# Altium PCB IMX291.PcbDoc
Units mil, origin at the board's own origin, x right, y up, seen from the top; angles counter-clockwise.
Board outline 2450 x 2235 mil, 2 copper layers (Top Layer, Bottom Layer); 66 components, 59 nets, 397 pads, 71 vias.
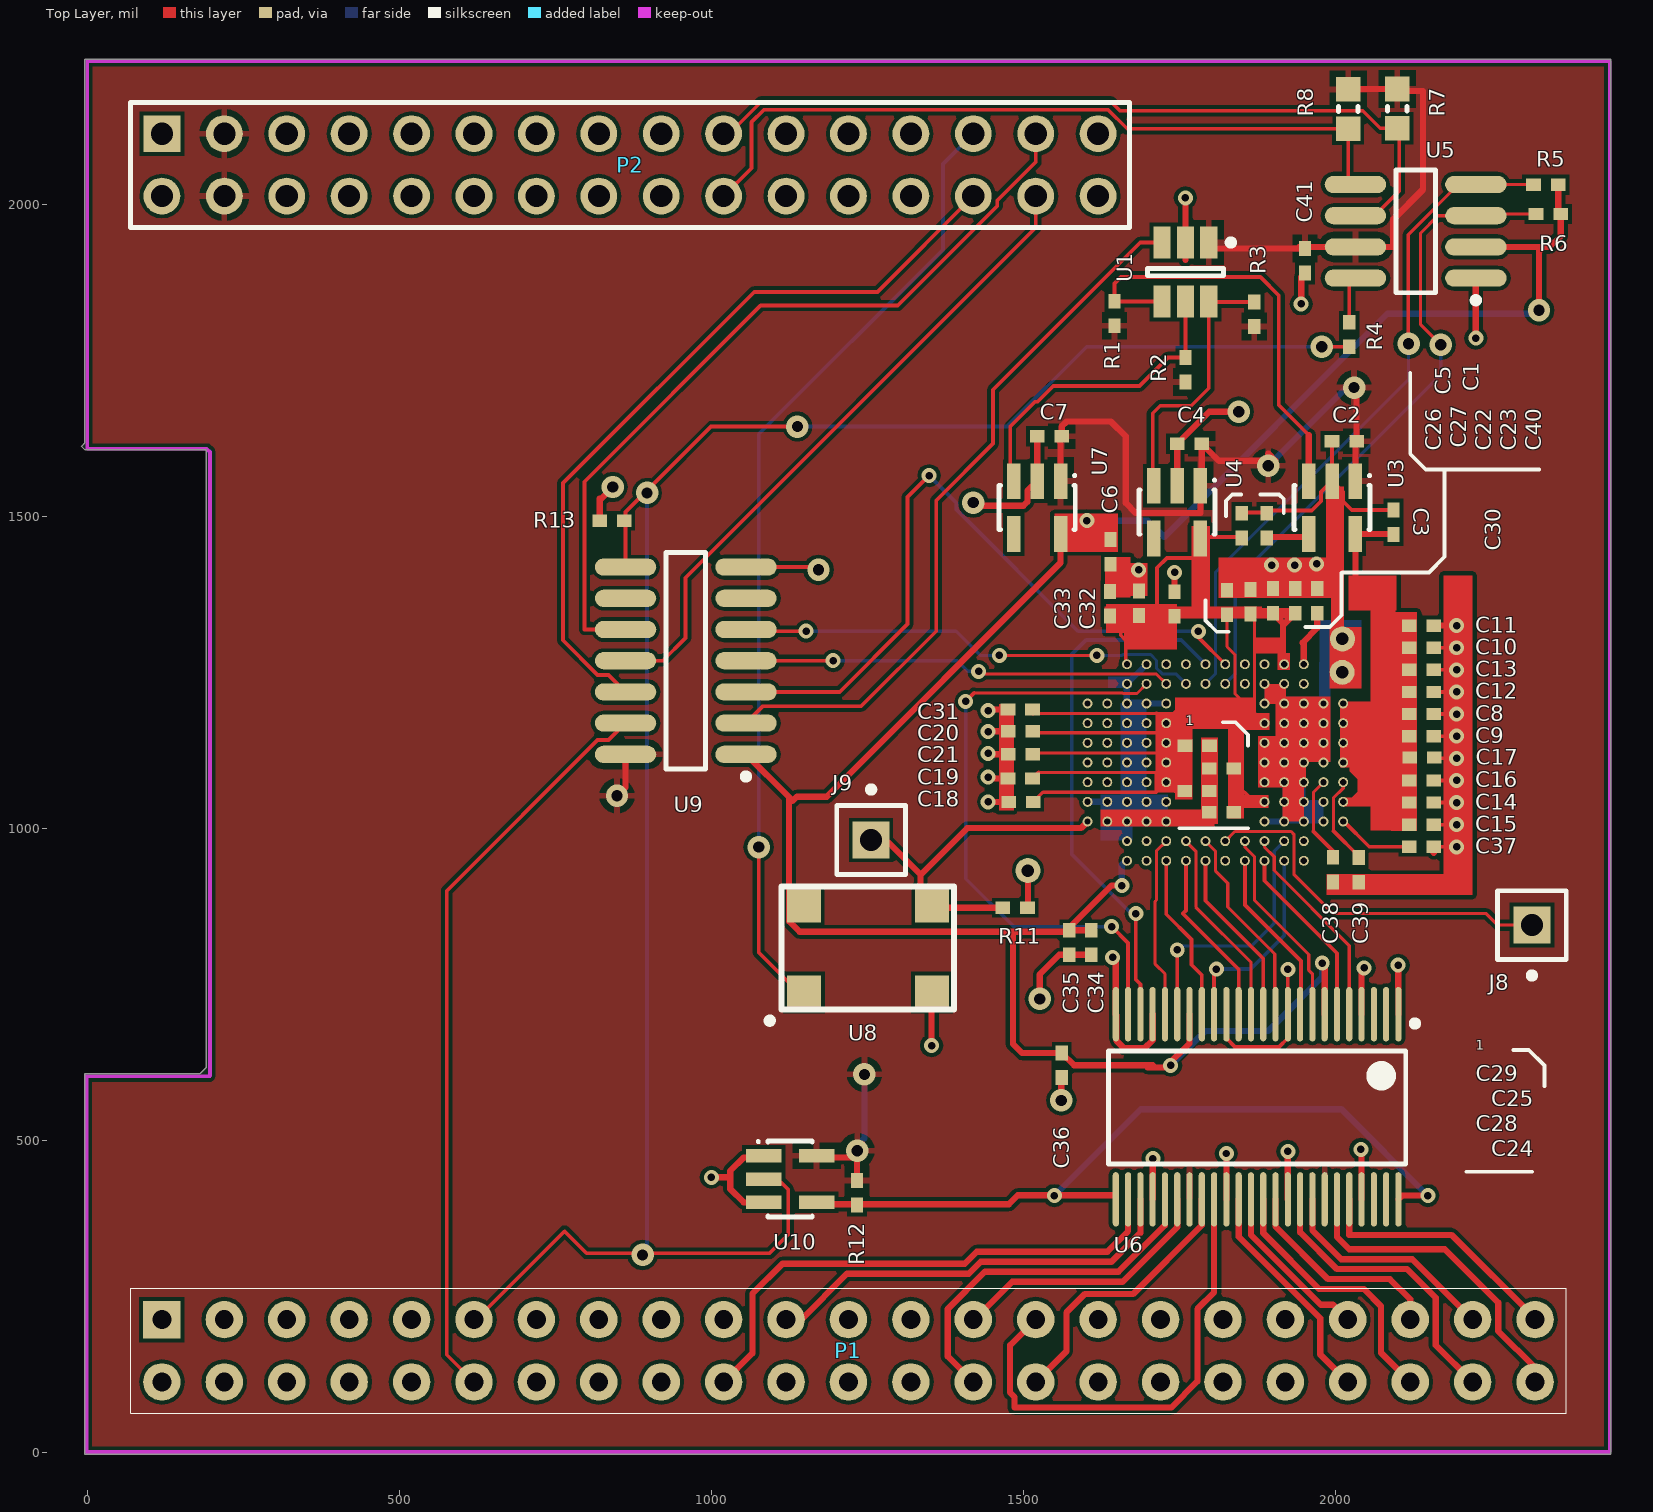
[diagram p0: Top Layer view]
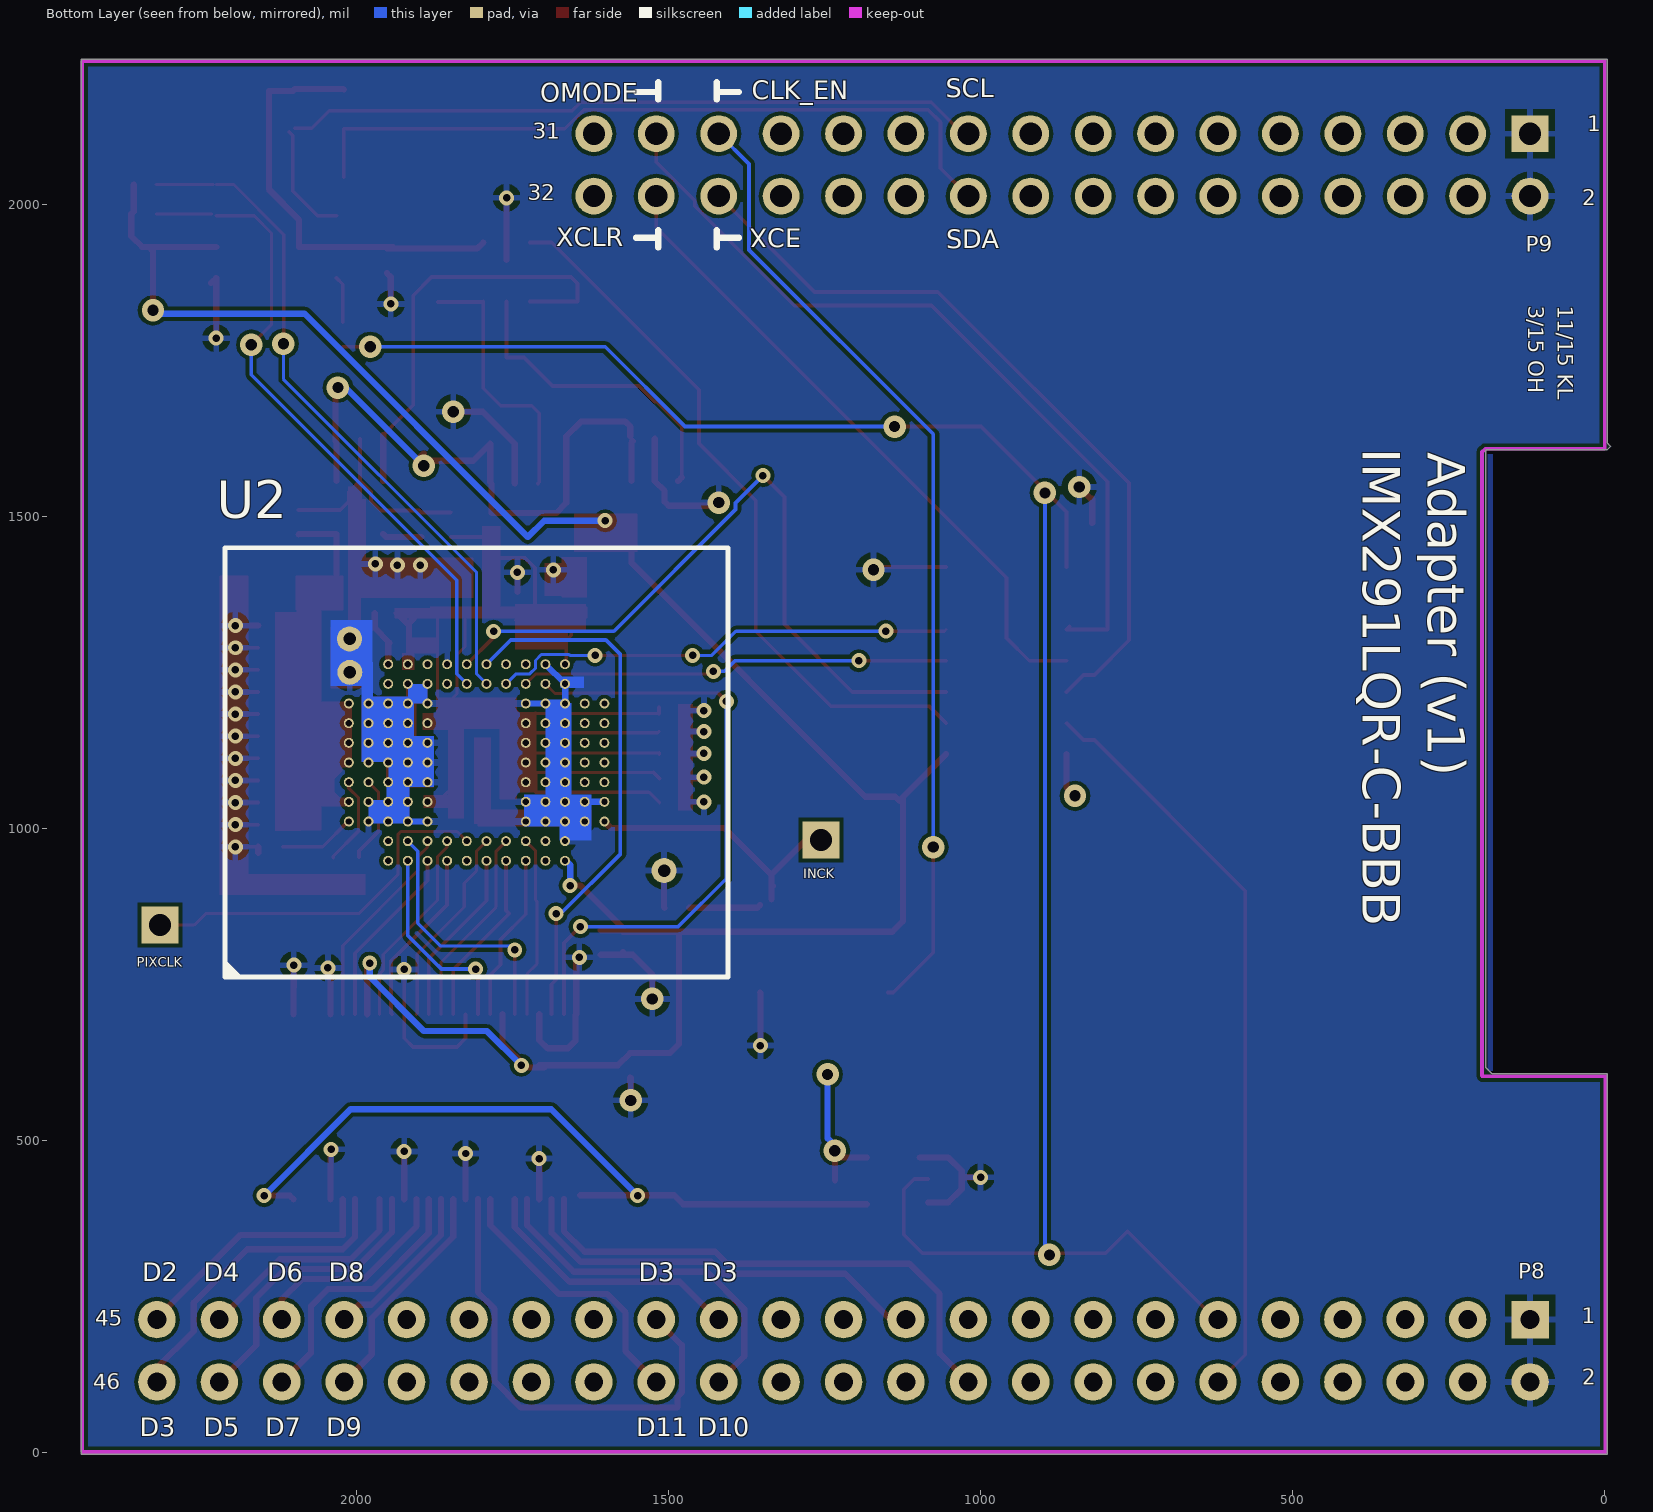
[diagram p1: Bottom Layer view, seen from below]

## Layer stack, top to bottom
Top Solder: solder mask 0.4, Solder Resist, Dk 3.5
Top Layer: signal copper 1.4
Dielectric 1: dielectric 12.6, FR-4, Dk 4.8
Bottom Layer: signal copper 1.4
Bottom Solder: solder mask 0.4, Solder Resist, Dk 3.5

## Board outline
2441.04,2231.97 2441.04,-3.03 -3.96,-3.03 -3.96,606.97 181.04,606.97 191.04,616.97 191.04,1606.97 -3.96,1606.97 -8.96,1611.97 -3.96,1616.97 -3.96,2231.97

## Design rules (kind name [scope] priority, off if disabled: settings)
Clearance [All] p1: gap=6
ComponentClearance [All] p1: gap=2 collisioncheckmode=3 verticalgap=10 showdistances=TRUE
HoleSize [All] p1: absolutevalues=TRUE maxlimit=100 minlimit=12 maxpercent=80.000 minpercent=20.000
MinimumAnnularRing [All] p1: minimumring=6
MinimumSolderMaskSliver [All] p1: minsoldermaskwidth=5
PolygonConnect [All] p1: connectstyle=Relief reliefconductorwidth=10 reliefentries=4 polygonreliefangle="90 Angle" airgapwidth=10
RoutingVias [All] p1: holewidth=28 width=50 viastyle="Through Hole" minholewidth=28 minwidth=50 maxholewidth=28 maxwidth=50
SolderMaskExpansion [All] p1: expansion=4
Width [All] p1: maxlimit=10 minlimit=5 preferedwidth=10
27 further rules are at their usual default settings.

## Components (designator, comment, footprint, x,y, rotation, side; value= is the part's Value field where it differs from the comment)
C1 "10nF" 0402#1 1890,1485 r90 top
C2 "1uF" 0402#1 2014.48,1620.31 r180 top
C3 "1uF" 0402#1 2093.22,1490.39 r270 top
C4 "1uF" 0402#1 1766.45,1616.38 r180 top
C5 "1uF" 0402#1 1850,1485 r270 top
C6 "1uF" 0402#1 1639.76,1442.91 r90 top
C7 "1uF" 0402#1 1542.04,1628.19 r180 top
C8 "0.1uF" 0402#1 2138.19,1183.07 r0 top
C9 "1.0uF" 0402#1 2138.19,1147.64 r0 top
C10 "0.1uF" 0402#1 2138.19,1289.37 r180 top
C11 "4.7uF" 0402#1 2138.19,1324.8 r180 top
C12 "0.1uF" 0402#1 2138.19,1218.5 r180 top
C13 "4.7uF" 0402#1 2138.19,1253.94 r180 top
C14 "4.7uF" 0402#1 2138.19,1041.34 r180 top
C15 "0.1uF" 0402#1 2138.19,1005.91 r180 top
C16 "4.7uF" 0402#1 2138.19,1076.77 r180 top
C17 "0.1uF" 0402#1 2139.01,1113.43 r180 top
C18 "0.01uF" 0402#1 1496.46,1042.13 r0 top
C19 "1.0uF" 0402#1 1495.28,1079.92 r0 top
C20 "0.01uF" 0402#1 1495.67,1155.51 r0 top
C21 "1.0uF" 0402#1 1495.67,1118.9 r0 top
C22 "0.1uF" 0402#1 1900.3,1364.41 r270 top
C23 "4.7uF" 0402#1 1935.74,1364.41 r270 top
C24 "0.1uF" 0402#1 1817.72,1025.98 r0 top
C25 "4.7uF" 0402#1 1817.72,1096.06 r0 top
C26 "0.1uF" 0402#1 1826.38,1361.81 r270 top
C27 "4.7uF" 0402#1 1864.17,1362.99 r270 top
C28 "0.1uF" 0402#1 1778.35,1059.84 r180 top
C29 "4.7uF" 0402#1 1778.74,1132.28 r180 top
C30 "0.1uF" 0402#1 1742.52,1359.45 r270 top
C31 "4.7uF" 0402#1 1495.28,1190.55 r0 top
C32 "0.1uF" 0402#1 1685.43,1360.63 r270 top
C33 "4.7uF" 0402#1 1638.98,1359.84 r270 top
C34 ".01uF" 0402#1 1608.96,817.16 r270 top
C35 "4.7uF" 0402#1 1573.53,817.16 r270 top
C36 "18pF" 0402#1 1561.72,620.31 r90 top
C37 "1uF" 0402#1 2138.19,970.47 r0 top
C38 "1uF" 0402#1 1996.46,933.86 r270 top
C39 "1uF" 0402#1 2037.4,933.46 r270 top
C40 "0.22uF" 0402#1 1971.17,1364.41 r90 top
C41 "1uF" 0402#2 1951.58,1909.33 r270 top
J8 "PIXCLK" PIN1 2314.96,844.88 r180 top
J9 "INCK" PIN1 1256.3,981.5 r0 top
P1 "P8" HEADER23X2 1220,162.97 r0 top
P2 "P9" HDR2X16 120,2112.97 r0 top
R1 "100k" 0402#1 1646.06,1824.8 r270 top
R2 "100k" 0402#2 1759.84,1734.65 r90 top
R3 "100k" 0402#1 1870.08,1823.62 r270 top
R4 "200k" 0402#1 2022.44,1791.22 r90 top
R5 "1k" 0402#1 2337.4,2031.38 r0 top
R6 "1k" 0402#1 2341.34,1984.14 r0 top
R7 "10k" 0603 2099.22,2153.04 r270 top
R8 "10k" 0603 2020.59,2152.4 r270 top
R11 "1K" 0402#1 1487.01,872.83 r180 top
R12 "1K" 0402#1 1233.67,416.22 r90 top
R13 "1K" 0402#1 841.25,1492.99 r0 top
U1 "LM3880" SOT23-6_M 1759.84,1891.34 r270 top
U2 "IMX291" SOCKET 1807.87,1105.51 r0 bottom
U3 "LP3985_2.9" DBV005 1994.79,1514.01 r180 top
U4 "LP3990_1.2" DBV005 1746.46,1506.69 r180 top
U5 "PCA9306" D008_M 2128.74,1956.58 r180 top
U6 "SN74AVCH16T245" TSSOP48 2101.09,687.24 r270 top
U7 "LP3990_1.8" DBV005 1522.35,1514.01 r180 top
U8 "DSC1001" DSC1001 1283.87,781.9 r180 top
U9 "TXB0104" TSSOP14_M 959.36,1268.58 r180 top
U10 "SN74LVC1G04" DBV005 1126.58,438.04 r270 top

## Footprints (in the part's own frame and the unit in brackets; to place one, negate y for a bottom-side part, rotate by r counter-clockwise, add the part's x,y. Pads: shape width x height; smd on the part's side, far side on the other; paste and mask are expansions set on the pad)
0402#1 [mm] "Chip Capacitor, Body 1.0x0.5mm, IPC High Density"
  rect 0.6x0.5 smd: 1(-0.5,0) 2(0.5,0)
  body extent -0.55,-0.3 0.55,0.3, height 1.3
0402#2 [mm] "Chip Capacitor, Body 1.0x0.5mm, IPC High Density"
  rect 0.6x0.5 smd: 1(0.5,0) 2(-0.5,0)
  body extent -0.55,-0.3 0.55,0.3, height 1.3
0603 [mm] "Chip Capacitor, 2-Leads, Body 1.6x0.8mm, IPC Medium Density"
  rect 1x1 smd: 1(-0.8,0) 2(0.8,0)
  silkscreen extent -0.1,-0.4 0.1,0.4, body extent -0.9,-0.5 0.9,0.5, height 0.87
D008_M [mm] "8-Pin Small Outline Integrated Circuit 1.27 mm Pitch, IPC Low Density"
  oval 2.5x0.7 smd: 1(-2.45,1.905) 2(-2.45,0.635) 3(-2.45,-0.635) 4(-2.45,-1.905) 5(2.45,-1.905) 6(2.45,-0.635) 7(2.45,0.635) 8(2.45,1.905)
  silkscreen extent -2.58,-2.5 0.8,2.93, body extent -2,-2.5 2,2.5, height 1.75
DBV005 [mm] "SOT-23/SC-74A; 5 Leads; Body 3 x 3 mm, inc. leads (LxW max)"
  rect 0.55x1.45 smd: 1(-0.95,-1.075) 2(0,-1.075) 3(0.95,-1.075) 4(0.95,1.075) 5(-0.95,1.075)
  silkscreen extent -1.58,-1.35 1.55,0.9
DSC1001 [mil]
  rect 55x55 smd paste+0 mask+0: 1(135,45) 2(-70,45) 3(-70,-95) 4(135,-95)
  Top Overlay keep-out lines w10: 171,72 171,-125 -105,-125 -105,72 171,72
  silkscreen extent -105,-125 195,95
HDR2X16 [mm] "Connector; Header; 16x2 Position"
  rect 1.5x1.5 hole 0.9: 1(0,0)
  round 1.5 hole 0.9: 2(0,-2.54) 3(2.54,0) 4(2.54,-2.54) 5(5.08,0) 6(5.08,-2.54) 7(7.62,0) 8(7.62,-2.54) 9(10.16,0) 10(10.16,-2.54) 11(12.7,0) 12(12.7,-2.54) 13(15.24,0) 14(15.24,-2.54) 15(17.78,0) 16(17.78,-2.54) 17(20.32,0) 18(20.32,-2.54) 19(22.86,0) 20(22.86,-2.54) 21(25.4,0) 22(25.4,-2.54) 23(27.94,0) 24(27.94,-2.54) 25(30.48,0) 26(30.48,-2.54) 27(33.02,0) 28(33.02,-2.54) 29(35.56,0) 30(35.56,-2.54) 31(38.1,0) 32(38.1,-2.54)
  silkscreen extent -1.27,-3.81 39.37,1.27
HEADER23X2 [mil] "HEADER23X2"
  rect 60x60 hole 30 mask+2: 1(-1100,50)
  round 60 hole 30 mask+2: 2(-1100,-50) 3(-1000,50) 4(-1000,-50) 5(-900,50) 6(-900,-50) 7(-800,50) 8(-800,-50) 9(-700,50) 10(-700,-50) 11(-600,50) 12(-600,-50) 13(-500,50) 14(-500,-50) 15(-400,50) 16(-400,-50) 17(-300,50) 18(-300,-50) 19(-200,50) 20(-200,-50) 21(-100,50) 22(-100,-50) 23(0,50) 24(0,-50) 25(100,50) 26(100,-50) 27(200,50) 28(200,-50) 29(300,50) 30(300,-50) 31(400,50) 32(400,-50) 33(500,50) 34(500,-50) 35(600,50) 36(600,-50) 37(700,50) 38(700,-50) 39(800,50) 40(800,-50) 41(900,50) 42(900,-50) 43(1000,50) 44(1000,-50) 45(1100,50) 46(1100,-50)
  silkscreen extent -1150,-100 1150,100
PIN1 [mm] "Connector; Plug"
  rect 1.5x1.5 hole 0.9: 1(0,0)
  silkscreen extent -1.4,-1.4 1.4,2.17
SOCKET [mil]
  round 16 hole 10 mask+0: 2(204.72,94.49) 3(204.72,62.99) 4(204.72,31.5) 5(204.72,0) 6(204.72,-31.5) 7(204.72,-62.99) 8(204.72,-94.49) 10(173.23,94.49) 11(173.23,62.99) 12(173.23,31.5) 13(173.23,0) 14(173.23,-31.5) 15(173.23,-62.99) 16(173.23,-94.49) 17(141.73,157.48) 18(141.73,125.98) 19(141.73,94.49) 20(141.73,62.99) 21(141.73,31.5) 22(141.73,0) 23(141.73,-31.5) 24(141.73,-62.99) 25(141.73,-94.49) 26(141.73,-125.98) 27(141.73,-157.48) 28(110.24,157.48) 29(110.24,125.98) 30(110.24,94.49) 31(110.24,62.99) 32(110.24,31.5) 33(110.24,0) 34(110.24,-31.5) 35(110.24,-62.99) 36(110.24,-94.49) 37(110.24,-125.98) 38(110.24,-157.48) 39(78.74,157.48) 40(78.74,125.98) 41(78.74,94.49) 42(78.74,62.99) 43(78.74,31.5) 44(78.74,0) 45(78.74,-31.5) 46(78.74,-62.99) 47(78.74,-94.49) 48(78.74,-125.98) 49(78.74,-157.48) 50(47.24,157.48) 51(47.24,125.98) 52(47.24,-125.98) 53(47.24,-157.48) 54(15.75,157.48) 55(15.75,125.98) 56(15.75,-125.98) 57(15.75,-157.48) 58(-15.75,157.48) 59(-15.75,125.98) 60(-15.75,-125.98) 61(-15.75,-157.48) 62(-47.24,157.48) 63(-47.24,125.98) 64(-47.24,-125.98) 65(-47.24,-157.48) 66(-78.74,157.48) 67(-78.74,125.98) 68(-78.74,94.49) 69(-78.74,62.99) 70(-78.74,31.5) 71(-78.74,0) 72(-78.74,-31.5) 73(-78.74,-62.99) 74(-78.74,-94.49) 75(-78.74,-125.98) 76(-78.74,-157.48) 77(-110.24,157.48) 78(-110.24,125.98) 79(-110.24,94.49) 80(-110.24,62.99) 81(-110.24,31.5) 82(-110.24,0) 83(-110.24,-31.5) 84(-110.24,-62.99) 85(-110.24,-94.49) 86(-110.24,-125.98) 87(-110.24,-157.48) 88(-141.73,157.48) 89(-141.73,125.98) 90(-141.73,94.49) 91(-141.73,62.99) 92(-141.73,31.5) 93(-141.73,0) 94(-141.73,-31.5) 95(-141.73,-62.99) 96(-141.73,-94.49) 97(-141.73,-125.98) 98(-141.73,-157.48) 99(-173.23,94.49) 100(-173.23,62.99) 101(-173.23,31.5) 102(-173.23,0) 103(-173.23,-31.5) 104(-173.23,-62.99) 105(-173.23,-94.49) 107(-204.72,94.49) 108(-204.72,62.99) 109(-204.72,31.5) 110(-204.72,0) 111(-204.72,-31.5) 112(-204.72,-62.99) 113(-204.72,-94.49)
  silkscreen extent -403,-344 405,344, body extent -405,-345 405,345, height 138
SOT23-6_M [mm] "SOT23, 6-Leads, Body 2.9x1.6mm, Pitch 0.95mm, Lead Span 2.7mm, IPC Low Density"
  rect 1.3x0.7 smd: 1(-1.2,0.95) 2(-1.2,0) 3(-1.2,-0.95) 4(1.2,-0.95) 5(1.2,0) 6(1.2,0.95)
  silkscreen extent -1.32,-1.55 0.15,1.98, body extent -0.9,-1.55 0.9,1.55, height 1.45
TSSOP14_M [mm] "14-Pin Small Outline Integrated Circuit 1.27 mm Pitch, IPC Low Density"
  oval 2.5x0.7 smd: 1(-2.45,3.81) 2(-2.45,2.54) 3(-2.45,1.27) 4(-2.45,0) 5(-2.45,-1.27) 6(-2.45,-2.54) 7(-2.45,-3.81) 8(2.45,-3.81) 9(2.45,-2.54) 10(2.45,-1.27) 11(2.45,0) 12(2.45,1.27) 13(2.45,2.54) 14(2.45,3.81)
  silkscreen extent -2.58,-4.4 0.8,4.83, body extent -2,-4.38 2,4.38, height 1.75
TSSOP48 [mm]
  oval 2.212x0.25 smd: 1(-0.381,0) 2(-0.381,-0.5) 3(-0.381,-1) 4(-0.381,-1.5) 5(-0.381,-2) 6(-0.381,-2.5) 7(-0.381,-3) 8(-0.381,-3.5) 9(-0.381,-4) 10(-0.381,-4.5) 11(-0.381,-5) 12(-0.381,-5.5) 13(-0.381,-6) 14(-0.381,-6.5) 15(-0.381,-7) 16(-0.381,-7.5) 17(-0.381,-8) 18(-0.381,-8.5) 19(-0.381,-9) 20(-0.381,-9.5) 21(-0.381,-10) 22(-0.381,-10.5) 23(-0.381,-11) 24(-0.381,-11.5) 25(7.154,-11.5) 26(7.154,-11) 27(7.154,-10.5) 28(7.154,-10) 29(7.154,-9.5) 30(7.154,-9) 31(7.154,-8.5) 32(7.154,-8) 33(7.154,-7.5) 34(7.154,-7) 35(7.154,-6.5) 36(7.154,-6) 37(7.154,-5.5) 38(7.154,-5) 39(7.154,-4.5) 40(7.154,-4) 41(7.154,-3.5) 42(7.154,-3) 43(7.154,-2.5) 44(7.154,-2) 45(7.154,-1.5) 46(7.154,-1) 47(7.154,-0.5) 48(7.154,0)
  silkscreen extent -0.12,-11.8 5.72,0.8, body extent 0.33,-11.8 6.48,0.3, height 1.2

## Part data
C1 C2 C3 C4 C5 C6 C7 C8 C9 C10 C11 C12 C13 C14 C15 C16 C17 C18 C19 C20 C21 C22 C23 C24 C25 C26 C27 C28 C29 C30 C31 C32 C33 C34 C35 C36 C37 C38 C39 C40 C41: library part cap
J8 J9: library part Socket, "Socket"
P1: library part HDR_46_F_2_0.1_0.1, "CONN HEADER FMAL 46PS.1\" DL GOLD"
P2: library part "Header 16X2"
R1 R2 R3 R4 R5 R6 R7 R8: library part Res, "resistor"
R11 R12 R13: library part res
U3: library part LP3985
U4 U7: library part LP3990

## Free pads (board coordinates)
  round 40 hole 20: 1(2011.02,1250) 1(2011.42,1303.54) 2(1507.48,932.28)

## Via types
v1: diameter 24, hole 12, Top Layer to Bottom Layer, 52 vias
v2: diameter 36, hole 18, Top Layer to Bottom Layer, 19 vias

## Nets (pads, with @x,y where several pads share a name; then routed paths per layer and width w, separated by ;. In a path a pad name is that pad's centre, name@x,y a point inside that pad or via, vN(x,y) a via of type N, cw(c..) or ccw(c..) an arc to the next point about the centre after c; other vN are vias at no path point)
1.2V: C5.2 C18.2 C19.2 C20.2 C21.2 C22.2 C23.2 C24.2 C25.2 C26.2 C27.2 C28.2 C29.2 C30.2 C31.2 C32.2 C33.2 U2.38 U2.42 U2.46 U2.70 U2.71 U2.72 U2.73 U2.98 U4.5 | length 2261.5
  Top Layer w5: C18.2@1514.57,1040.94 1531.53,1057.91 1609.52,1057.91 1609.66,1057.77 1628.13,1057.77 1628.27,1057.91 1641.02,1057.91 1641.16,1057.77 1659.63,1057.77 1659.77,1057.91 1672.52,1057.91 1672.66,1057.77 1691.12,1057.77 1691.26,1057.91 1704.01,1057.91 1704.15,1057.77 1713.14,1057.77 ; C21.2@1515.35,1121.01 1713.14,1121.01 ; C20.2 1517.75,1153.11 1713.03,1153.11 ; C31.2@1515.75,1184 1713.64,1184 ; C19.2@1524.68,1089.64 1713.14,1089.64 ; C26.2 1826.38,1291.24 1839.12,1278.49 1839.12,1216 1870.62,1184.5 C27.2@1870.62,1336.86
  Top Layer w6: C19.2 C19.2@1524.68,1089.64 ; C21.2 C21.2@1515.35,1121.01 ; C31.2@1515.75,1184 C31.2@1515.75,1194.09 ; C33.2@1638.98,1343.31 1656.21,1326.07 1656.21,1309.29 1664.08,1301.42 ; U2.98 1664.08,1265.05 1664.08,1301.42 ; C32.2@1684.96,1334.1 1664.08,1313.23 1664.08,1301.42 ; C32.2 1696.85,1340.94 1714.42,1358.52 1714.42,1417.57 1730.16,1433.31 1784.16,1433.31 ; 1713.03,1153.11 U2.72 1713.14,1121.01 ; 1713.14,1057.77 1713.14,1067.04 1713.53,1067.43 1713.53,1080.6 1713.14,1080.99 1713.14,1089.64 ; 1713.14,1089.52 U2.71 ; 1713.64,1184 U2.73 1729.13,1172.03 1745,1187.89 ; C30.2@1738.58,1339.76 C30.2@1745,1333.35 ; 1758.27,1102.76 1729.53,1074.02 U2.70 1743.31,1059.84 C28.2 ; 1790.07,1433.31 1784.16,1433.31 ; C24.2@1835.83,1018.9 1859.45,1042.52 1869.68,1042.52 ; C25.2 1837.4,1074.8 1869.68,1042.52 ; C5.2@1849.12,1466.77 1785.15,1466.77 1784.16,1467.75 1784.16,1433.31 ; C27.2 C27.2@1870.62,1336.86 ; 1870.62,1184.5 U2.46 ; U2.42 1869.68,1042.52
  Top Layer w10: C22.2 1916.05,1328.97 ; U2.38 1916.05,1265.05 1916.05,1325.04 C23.2
  Bottom Layer w6: U2.98@1664.08,1265.84 U2.98@1665.75,1264.17
1.8V: C6.2 C34.1 C35.1 C36.2 R5.2 R6.2 U2.88 U5.2 U6.7 U6.18 U7.5 U8.4 U9.1 | length 3802.6
  Top Layer w10: U9.1 1124.83,1049.56 ; C35.1@1573.53,840.52 1641.3,908.28 v1(1657.91,908.28) ; 1605.03,1471.69 U7.5 1559.75,1425.43 1185.05,1050.73 1137.34,1050.73 1130.5,1043.89 1124.83,1049.56 ; C34.1 C35.1 1573.53,834.16 1483.49,834.16 ; 1699.48,617.02 1727.72,617.02 1766.45,655.75 U6.18 ; 1707.39,620.31 1581.41,620.31 C36.2 1498.1,640 1483.49,654.6 1483.49,834.16 ; v1(1979.07,784.23) 1982.98,780.32 U6.7 ; U5.2 2333.07,1931.58 ; v2(2326.38,1829.92) 2326.38,1924.88 2333.07,1931.58 ; R5.2 2357.09,1988.07 R6.2 2361.03,1948.7 2343.9,1931.58 2333.07,1931.58 ; 1124.83,1049.56 1124.83,851.02 1141.69,834.16 1483.49,834.16
  Bottom Layer w10: v1(1601.97,1492.91) 1699.68,1492.91 1725.83,1466.77 2083.46,1824.41 2320.47,1824.41 v2@2324.41,1820.47 ; v1(1657.91,908.28) 1657.91,941.37 U2.88@1665.75,949.21 ; v1(1736.3,620.31) 1791.3,675.32 1892.46,675.32 1979.07,761.92 v1(1979.07,784.23)
2.9V: C3.2 C8.1 C9.1 C10.2 C11.2 C12.2 C13.2 C14.2 C15.2 C16.2 C17.2 U2.3 U2.5 U2.6 U2.7 U2.8 U3.5 | length 202.4
  Top Layer w10: 2032.19,1393.94 U3.5 2092.23,1471.69 C3.2 ; 2102.76,1167.32 C8.1 ; 2102.76,1238.19 C13.2 ; C9.1@2110.63,1139.76 C9.1 ; C12.2@2114.57,1214.57 C12.2 ; C11.2@2118.5,1322.83 C11.2
3.3V: C2.1 C4.1 C7.1 C41.2 P2.3 P2.4 R1.2 R2.2 R3.2 R7.1 R8.1 R12.2 U1.1 U3.1 U4.1 U5.7 U6.31 U6.42 U7.1 U9.14 U10.5 | length 2046.2
  Top Layer w10: v2(849.12,1052.04) 862.9,1065.82 U9.14 ; U10.5@1182.78,472.68 v2@1233.67,472.68 ; R12.2 v2@1233.67,472.68 ; v2(1233.89,483.64) 1233.67,483.42 v2@1233.67,472.68 ; v2@1233.89,486.45 1241.28,493.85 1242.45,493.85 1234.02,485.43 v2@1234.02,483.64 ; C7.1@1557.78,1620.31 1559.75,1618.34 U7.1 ; C7.1 1561.72,1643.94 1569.59,1651.81 1640.46,1651.81 1664.08,1628.19 1664.08,1521.35 1680.32,1505.12 1784.16,1505.12 1784.16,1552.4 1786.13,1554.37 C4.1@1786.13,1612.44 ; C4.1 1813.53,1588.98 1904.08,1588.98 1892.43,1600.63 v2(1892.43,1580.94) ; U1.1 1806.81,1929.02 C41.2 ; C41.2@1942.32,1931.58 U5.7 2092.36,1931.58 2092.5,1931.72 2092.5,1975.51 2140.5,2023.52 2140.5,2181.57 2102.18,2181.57 R7.1 2021.22,2184.53 R8.1 ; U3.1 2032.19,1622.28 C2.1 v2@2034.16,1699.05
  Bottom Layer w10: v2@1237.31,493.85 1236.8,494.36 1245.63,503.2 v2(1245.63,605.83) ; v2(1892.43,1580.94) v2@2022.35,1710.86
  other v2: 2030.13,1706.25
CLK_ENABLE: P2.27 U8.1 | length 1553.8
  Top Layer w6: v2(1076.09,970.03) 1076.09,801 1140.2,736.9 U8.1
  Bottom Layer w6: v2(1076.09,970.03) 1076.09,1631.6 1371.26,1926.77 1371.26,2064.23 P2.27
D0: P1.27 U6.30 | length 432.5
  Top Layer w10: P1.27 1421.63,212.97 1482.28,273.62 1659.19,273.62 1746.76,361.19 U6.30
D0B: U2.29 U6.19 | length 414.2
  Top Layer w5: U6.19 v1(1746.76,805.35)
  Bottom Layer w5: v1(1746.76,805.35) 1752.67,811.26 1865.26,811.26 1902.11,848.11 1902.11,963.53 U2.29
D1: P1.29 U6.33 | length 773.9
  Top Layer w10: P1.29 1479,171.97 1479,95.99 1486.14,88.85 1486.14,71.97 1736.99,71.97 1779,113.99 1779,229.95 1805.82,256.76 U6.33
D1B: U2.28 U6.16 | length 340.9
  Top Layer w6: U6.16 1805.82,781.73 1809.36,778.19 v1(1809.36,774.64)
  Bottom Layer w6: v1(1809.36,774.64) 1864.35,774.64 1877.56,787.85 1918.11,828.41 U2.28 U2.28@1915.87,948.03
D2: P1.45 U6.44 | length 412
  Top Layer w10: U6.44 2022.35,348.52 2186.31,348.52 2320,214.82 P1.45
D3: P1.46 U6.43 | length 513.8
  Top Layer w10: U6.43 2002.67,345.37 2022.22,325.81 2175.37,325.81 2261,240.18 2261,194.6 2320,135.6 P1.46
D4: P1.43 U6.41 | length 365.6
  Top Layer w10: U6.41 1963.3,355.88 2009.36,309.81 2123.16,309.81 P1.43
D5: P1.44 U6.40 | length 472.8
  Top Layer w10: U6.40 1943.61,352.94 2002.74,293.81 2114.96,293.81 2161,247.77 2161,171.97 P1.44
D6: P1.41 U6.38 | length 340.1
  Top Layer w10: U6.38 1904.24,361.9 1988.33,277.81 2087.54,277.81 2120,245.35 P1.41
D7: P1.42 U6.37 | length 432.1
  Top Layer w10: U6.37 1884.56,351.66 1974.4,261.81 2046.08,261.81 2073.23,234.67 2073.23,159.75 P1.42
D8: P1.39 U6.36 | length 268.2
  Top Layer w10: U6.36 1864.87,348.71 1977,236.58 1996.39,236.58 P1.39
D9: P1.40 U6.35 | length 365
  Top Layer w10: U6.35 1845.19,345.77 1975.98,214.97 1975.98,156.99 P1.40
D10: P1.28 U6.29 | length 579.1
  Top Layer w10: P1.28 1379,153.97 1379,229.95 1438.67,289.62 1652.56,289.62 1727.08,364.14 U6.29
D10G: U2.67 U6.20 | length 291.2
  Top Layer w5: U6.20 1727.08,766.77 1711.33,782.52 1711.33,882.98 1713.63,885.29 1713.63,964.03 U2.67
D11: P1.30 U6.32 | length 448
  Top Layer w10: P1.30 1569.29,162.26 1569.29,224.41 1598.85,253.97 1675.97,253.97 1786.13,364.14 U6.32
FLAG1: R3.1 U1.6 U4.3 | length 432
  Top Layer w6: U4.3@1709.36,1552.4 1707.39,1554.37 1707.39,1664.96 1719.59,1677.17 1769.29,1677.17 1797.24,1705.12 U1.6 1798.03,1843.31 R3.1
FLAG2: R2.1 U1.5 U7.3 | length 506.3
  Top Layer w6: U7.3@1479.04,1562.24 1479.04,1643.94 1518.41,1683.31 1522.35,1683.31 1547.94,1708.9 1686.45,1708.9 1731.89,1754.33 R2.1 U1.5
  Top Layer w10: U7.3@1479.04,1562.24 U7.3
FLAG3: R1.1 U1.4 U3.3 | length 702.4
  Top Layer w6: U1.4 1646.46,1844.09 R1.1 1646.06,1872.83 1656.69,1883.46 1879.92,1883.46 1909.46,1853.93 1909.46,1678.09 1957.39,1630.16
  Top Layer w10: U3.3 1957.39,1630.16
FRAME_VALID: U2.61 U6.22 | length 866.7
  Top Layer w6: v1(1680.32,863.39) 1680.32,757.62 1687.71,750.23 U6.22
  Bottom Layer w6: v1(1680.32,863.39) 1673.11,863.39 1577.56,958.93 1577.56,1278.74 1600.79,1301.97 1753.15,1301.97 U2.61
FRAME_VALID3.3: P1.21 U6.27 | length 679
  Top Layer w10: P1.21 1144.07,212.97 1217.57,286.47 1412.9,286.47 1432.05,305.62 1641.46,305.62 1687.71,351.87 U6.27
GND: C1.2 C2.2 C3.1 C4.2 C5.1 C6.1 C7.2 C8.2 C9.2 C10.1 C11.1 C12.1 C13.1 C14.1 C15.1 C16.1 C17.1 C18.1 C19.1 C20.1 C21.1 C22.1 C23.1 C24.1 C25.1 C26.1 C27.1 C28.1 C29.1 C30.1 C31.1 C32.1 C33.1 C34.2 C35.2 C36.1 C37.2 C38.2 C39.2 C40.2 C41.1 P1.1 P1.2 P2.1 P2.2 pad.1 pad.2 R11.1 R13.1 U1.2 U2.10 U2.11 U2.13 U2.14 U2.15 U2.16 U2.19 U2.20 U2.21 U2.22 U2.23 U2.24 U2.25 U2.30 U2.31 U2.32 U2.33 U2.34 U2.35 U2.36 U2.37 U2.41 U2.43 U2.44 U2.45 U2.47 U2.48 U2.53 U2.68 U2.69 U2.74 U2.79 U2.80 U2.81 U2.82 U2.83 U2.84 U2.85 U2.87 U2.89 U2.90 U2.91 U2.92 U2.93 U2.94 U2.95 U2.96 U2.97 U2.99 U2.100 U2.108 U3.2 U4.2 U5.1 U6.1 U6.4 U6.10 U6.15 U6.21 U6.24 U6.28 U6.34 U6.39 U6.45 U7.2 U8.2 U9.7 U10.1 U10.3 | length 4083.5
  Top Layer w6: U9.7@1055.42,1418.19 U9.7 1167.63,1418.58 v2(1171.96,1414.25) ; C33.1@1638.98,1382.68 1683.07,1382.68 C32.1 ; C25.1@1796.46,1101.57 C25.1@1798.43,1103.54 ; U6.15 1825.5,663.62 1839.42,649.7 1910.01,649.7 1923.93,663.62 U6.10 1923.93,773.91 v1(1924.03,774.02) ; C5.1@1849.12,1506.14 1896.37,1506.14 1899.46,1509.23 1962.39,1509.23 1977.22,1524.07 1977.22,1538.76 U3.2 ; C22.1 1994.79,1384.09 U3.2 ; C2.2@1994.79,1624.25 U3.2 ; C3.1 2026.36,1510.08 2012.37,1524.07 2012.37,1538.76 U3.2 ; C37.2 v1(2194.43,970.47) ; C15.1 v1(2194.43,1005.91) ; C14.1 v1(2194.43,1041.34) ; C16.1 v1(2194.43,1076.77) ; C17.1@2157.87,1112.2 v1(2194.43,1112.2) ; C9.2 v1(2194.43,1147.64) ; C8.2 v1(2194.43,1183.07) ; C12.1 v1(2194.43,1218.5) ; C13.1 v1(2194.43,1253.94) ; C10.1 v1(2194.43,1289.37)
  Top Layer w10: R13.1@821.56,1489.05 821.56,1528.42 823.96,1528.42 v2(842.44,1546.9) ; v1(1000.39,440.94) 1029.32,440.94 1030.5,442.13 ; U10.3 1052.01,400.64 1030.5,422.14 1030.5,442.13 ; U10.1@1098.14,472.68 1052.07,472.68 1030.5,451.11 1030.5,442.13 ; v2(1171.96,1414.25) v2@1179.83,1414.25 ; v1(1353.15,651.97) 1353.15,736.17 U8.2 ; v2(1419.99,1521.89) 1425.08,1516.79 1500.33,1516.79 1506.78,1523.24 1506.78,1540.76 U7.2 C7.2@1522.35,1624.25 ; v1(1443.7,1042.52) 1444.09,1042.13 C18.1 ; v1(1443.7,1081.89) 1445.67,1079.92 C19.1 ; v1(1443.7,1120.08) 1444.88,1118.9 C21.1 ; v1(1443.7,1155.12) 1444.09,1155.51 C20.1 ; v1(1443.7,1188.58) 1445.67,1190.55 C31.1 ; R11.1 1507.48,873.62 pad.2 ; v2(1526.29,726.61) 1526.29,765.98 1557.78,797.48 C35.2@1569.59,797.48 ; v2(1561.02,564.17) 1561.02,599.93 C36.1 C36.1@1561.72,592.75 ; C35.2 C35.2@1577.47,797.48 ; C35.2@1573.53,801.42 C35.2@1577.47,797.48 ; C34.2 C35.2@1577.47,797.48 ; v1(1643.31,793.31) 1648.34,788.28 U6.24 ; U6.24@1649.44,701.14 1649.44,659.68 1661.43,647.7 1694.3,647.7 1707.39,660.79 U6.21 ; U6.28 v1@1707.39,460.3 ; C30.1@1742.52,1386.45 C30.1 v1(1742.52,1410.24) ; U4.2@1746.76,1552.4 C4.2 1797.94,1667.56 v2(1845.19,1667.56) ; 1759.84,1911.02 U1.2 v1(1759.84,2010.24) ; U6.34 v1(1825.5,479.04) ; U6.39 v1(1923.93,482.37) ; v1(1945.28,1840.16) 1945.28,1883.35 C41.1 ; 1994.79,1384.09 2000.95,1377.93 2000.95,1314.01 pad.1@2011.42,1303.54 ; v1(2040.94,485.83) 2042.04,484.74 U6.45 ; U6.4 2042.04,772.35 v1(2046.06,776.38) ; v1(2100.79,780.71) 2100.79,745.19 2101.09,744.88 U6.1 ; C37.2@2157.87,960.82 C37.2 ; C11.1 v1(2194.43,1324.8) ; v1(2225.2,1785.32) U5.1 U5.1@2232.88,1873.9
  Bottom Layer w6: U2.32 U2.31 U2.30 U2.19 U2.10 ; U2.21 U2.20 U2.11
  Bottom Layer w10: U2.108 U2.100 ; U2.97@1665.75,1232.68 1665.75,1201.18 U2.85@1697.24,1201.18 ; U2.97 U2.87 ; U2.85 U2.74 ; U2.41@1886.22,1012.2 1887.38,1011.05 1916.56,1011.05 U2.30@1917.72,1012.2
  other v1: 1707.87,470.87 1685.04,1414.25 1898.03,1421.65 1934.65,1421.65 1970.08,1423.62
INCK: J9.1 R11.2 U2.107 U8.3 | length 562.3
  Top Layer w10: J9.1 1279.6,981.5 1335.5,925.59 ; 1333.54,907.48 1335.5,909.45 ; U8.3@1335.5,886.59 1335.5,909.45 ; U8.3 1357.94,872.83 R11.2 ; U2.107 1592.52,1000.39 1410.31,1000.39 1335.5,925.59 ; 1335.5,909.45 1335.5,925.59
LINE_VALID: U2.86 U6.23 | length 1003.1
  Top Layer w5: 1421.35,1216.93 1658.94,1216.93 1659.77,1216.11 1682.25,1216.11 U2.86
  Top Layer w6: v1(1407.87,1203.46) 1421.35,1216.93 ; v1(1641.73,842.52) 1668.02,816.23 U6.23
  Bottom Layer w6: v1(1407.87,1203.46) 1407.87,919.29 1484.65,842.52 v1(1641.73,842.52)
LINE_VALID3.3: P1.20 U6.26 | length 854.7
  Top Layer w10: P1.20 1066.14,159.11 1066.14,254.33 1114.28,302.47 1406.27,302.47 1425.42,321.62 1634.83,321.62 1668.02,354.81 U6.26
NetC1_1: C1.1 U3.4 | length 63.1
  Top Layer w10: C1.1@1896.37,1466.77 1952.47,1466.77 U3.4
NetC37_1: C37.1 U2.2 | length 122.7
  Top Layer w6: U2.2 2013.91,1011.02 2054.46,970.47 C37.1
NetC38_1: C38.1 U2.12 | length 140.1
  Top Layer w5: 1965.11,995.03 1965.11,1058.02 U2.12
  Top Layer w6: 1965.11,995.03 1996.46,963.68 C38.1
NetC39_1: C39.1 U2.4 | length 144
  Top Layer w5: 1997.1,995.52 1997.1,1048.94 2012.6,1064.44
  Top Layer w6: 1997.1,995.52 2037.4,955.22 C39.1 ; 2012.6,1064.44 U2.4
NetC40_1: C40.1 U2.27 | length 92.4
  Top Layer w10: U2.27 1949.61,1295.42 1947.55,1297.48 1971.17,1321.1 C40.1
NetJ8_1: J8.1 U2.55 | length 597.6
  Top Layer w5: U2.55 1839.12,995.03 1929.13,995.03 1933.61,990.55 1933.61,926.23 1996.45,863.39 2242,863.39 2260.51,844.88 J8.1
NetR4_2: R4.2 U5.8 | length 74.7
  Top Layer w6: R4.2 2022.44,1871.73 U5.8
NetR12_1: R12.1 U6.25 U6.48 U10.4 | length 1227.7
  Top Layer w10: U10.4@1182.78,397.87 1477.08,397.87 1491.35,412.15 1641.77,412.15 ; U6.48 2107.15,411.65 v1(2148.34,411.65)
  Bottom Layer w10: v1(1549.91,411.65) 1688.27,550.01 2009.97,550.01 v1(2148.34,411.65)
NetU2_39: U2.39 U6.6 | length 293.9
  Top Layer w6: U2.39 1886.61,915.89 2002.67,799.84 U6.6
NetU2_40: U2.40 U6.5 | length 333.6
  Top Layer w5: U2.40 1886.61,969.95 1902.11,954.45 1902.11,932.53 1901.97,932.39 2022.35,812 U6.5
NetU2_50: U2.50 U6.9 | length 283.6
  Top Layer w6: U2.50 1855.12,877.3 1945.03,787.39 1945.03,703.66 U6.9
NetU2_51: U2.51 U6.8 | length 322.2
  Top Layer w5: U2.51 1855.12,970.1 1870.62,954.6 1870.62,911.17 1870.47,911.02 1870.47,884.79 1957.48,797.78 1957.48,772.89 1963.3,767.08 U6.8
NetU2_58: U2.58 U6.12 | length 284.1
  Top Layer w6: U2.58 1792.13,883.86 1808.66,867.32 1884.56,791.43 U6.12
NetU2_59: U2.59 U6.11 | length 323.7
  Top Layer w5: U2.59 1808.12,963.53 1808.12,941.47 1808.27,941.32 1808.27,931.5 1827.69,912.07 1827.69,874.03 1903.03,798.69 1903.03,703.45 U6.11
NetU2_62: U2.62 U6.14 | length 284.9
  Top Layer w6: U2.62 1760.63,868.38 1755.65,863.4 1845.19,773.86 U6.14
NetU2_63: U2.63 U6.13 | length 320.5
  Top Layer w5: U2.63 1776.63,963.53 1776.63,873.8 1864.87,785.55 U6.13
NetU2_66: U2.66 U6.17 | length 269.4
  Top Layer w6: U2.66 1729.13,862.35 1769.68,821.8 1769.68,781.5 1786.13,765.05 U6.17
OE_SHIFTERS: P1.11 R4.1 R13.2 U9.8 U10.2 | length 3288.6
  Top Layer w6: P1.11 623.78,212.97 765.25,354.44 800.47,319.21 1093.58,319.21 1123.41,349.04 1123.41,421.44 1106.8,438.04 U10.2 ; U9.8 862.9,1506.77 999.83,1643.7 v2(1138.19,1643.7) ; v2(1978.23,1771.54) R4.1
  Bottom Layer w6: v2(890.16,316.54) 897.24,323.62 v2(897.24,1537.4) ; v2(1138.19,1643.7) 1474.02,1643.7 1601.85,1771.54 v2(1978.23,1771.54)
OMODE: U2.64 U9.5 | length 749.9
  Top Layer w5: U9.5 1058.57,1315.82 v1(1152.27,1315.82) ; v1@1462.6,1280.71 1466.14,1277.17 v1(1618.11,1277.17)
  Bottom Layer w5: v1(1152.27,1315.82) 1392.44,1315.82 1431.1,1277.17 v1(1461.81,1277.17) ; v1(1618.11,1277.17) 1658.39,1277.17 1659.72,1278.49 1704.06,1278.49 1713.63,1268.92 1713.63,1256.57 1722.71,1247.49 1744.63,1247.49 U2.64
OMODE3.3: P2.29 U9.10 | length 1295.5
  Top Layer w6: U9.10@857.78,1323.7 U9.10 797.17,1318.58 797.17,1555.44 1079.28,1837.55 1299.07,1837.55 1458.53,1997.01 1458.53,2005.98 1520,2067.46 P2.29
PWR_EN: U1.3 U9.2 | length 1158.9
  Top Layer w6: U9.2 1083.04,1195.8 1240.46,1195.8 1360.48,1315.82 1360.48,1525.37 1451.48,1616.38 1451.48,1702.71 1687.36,1938.58 U1.3
PWR_EN3.3: P1.12 U9.13 | length 1202.7
  Top Layer w6: P1.12 576.38,156.6 576.38,899.7 818.03,1141.36 835.68,1141.36 U9.13
SCL1.8V: R6.1 U2.56 U5.3 | length 1068.8
  Top Layer w5: v2(2168.85,1774.83) 2136.62,1807.07 2136.62,1953.96 2164.23,1981.58 U5.3 ; U5.3@2231.7,1984.14 R6.1
  Bottom Layer w5: U2.56 1839.62,1247.49 1839.62,1269.56 1839.76,1269.7 1839.76,1397.64 2168.85,1726.73 v2(2168.85,1774.83)
SCL3.3V: P2.19 R7.2 U5.6 | length 1301.3
  Top Layer w6: P2.19 1029.05,2112.97 1079.58,2163.5 1640.93,2163.5 1654.84,2149.59 2044,2149.59 2072.05,2121.54 R7.2 ; U5.6 2062.69,1981.58 2102.42,2021.31 2102.42,2110.28 R7.2@2108.25,2116.11
SDA1.8V: R5.1 U2.60 U5.4 | length 1088.6
  Top Layer w5: v2(2117.42,1776.39) 2116.89,1776.91 2116.89,1951.21 2197.26,2031.58 U5.4 ; U5.4@2229.33,2031.38 R5.1 R5.1@2321.66,2031.38
  Bottom Layer w5: U2.60 1808.12,1247.49 1808.12,1410.48 2117.42,1719.78 v2(2117.42,1776.39)
SDA3.3V: P2.20 R8.2 U5.5 | length 1191.6
  Top Layer w6: P2.20 1064.52,2057.49 1064.52,2131.48 1084.55,2151.5 1635.96,2151.5 1666.55,2120.91 R8.2 U5.5@2020.59,2043.28
XCE: U2.57 U9.3 | length 1167.7
  Top Layer w6: U9.3 1206,1218.58 1314.62,1327.2 1314.62,1530.7 v1(1349.12,1565.2) ; v1(1780.71,1315.75) 1780.71,1305.91 U2.57
  Bottom Layer w6: v1(1349.12,1565.2) 1392.99,1521.33 1392.99,1510.7 1587.94,1315.75 v1(1780.71,1315.75)
XCE3.3: P2.28 U9.12 | length 1234.3
  Top Layer w6: U9.12 835.68,1245.8 818.03,1245.8 762.6,1301.24 762.6,1553.15 1068.9,1859.45 1266.48,1859.45 P2.28
XCLR: U2.75 U9.4 | length 688.7
  Top Layer w5: v1@1432.93,1247 1713.63,1247 U2.75
  Top Layer w6: U9.4 v1(1195.58,1268.58) ; v1(1428.35,1251.57) v1@1432.93,1247
  Bottom Layer w6: v1(1195.58,1268.58) 1394.02,1268.58 1411.02,1251.57 v1(1428.35,1251.57)
XCLR3.3: P2.30 U9.11 | length 1051.5
  Top Layer w6: U9.11 922.52,1268.58 959.06,1305.12 959.06,1401.57 1520,1962.52 P2.30
pads on no net: P1.3 P1.4 P1.5 P1.6 P1.7 P1.8 P1.9 P1.10 P1.13 P1.14 P1.15 P1.16 P1.17 P1.18 P1.19 P1.22 P1.23 P1.24 P1.25 P1.26 P1.31 P1.32 P1.33 P1.34 P1.35 P1.36 P1.37 P1.38 P2.5 P2.6 P2.7 P2.8 P2.9 P2.10 P2.11 P2.12 P2.13 P2.14 P2.15 P2.16 P2.17 P2.18 P2.21 P2.22 P2.23 P2.24 P2.25 P2.26 P2.31 P2.32 U2.17 U2.18 U2.26 U2.49 U2.52 U2.54 U2.65 U2.76 U2.77 U2.78 U2.101 U2.102 U2.103 U2.104 U2.105 U2.109 U2.110 U2.111 U2.112 U2.113 U4.4 U6.2 U6.3 U6.46 U6.47 U7.4 U9.6 U9.9

## Polygon pours and split planes (outlines as drawn)
GND on Bottom Layer "GND" (solid, pour order 5): -7.9,2231.97 -12.9,2226.97 -12.9,1611.97 182.1,1611.97 187.1,1606.97 179.6,1599.47 179.6,609.47 -5.4,609.47 -7.9,606.97 -7.9,-3.03 2437.11,-3.03 2437.11,2231.97 -7.9,2231.97
3.3V on Top Layer "3.3V" (solid, pour order 4): 2437.1,2231.97 2437.1,-3.03 -7.9,-3.03 -7.9,606.97 177.1,606.97 182.1,611.97 187.1,616.97 187.1,1606.97 -7.9,1606.97 -12.9,1611.97 -7.9,1616.97 -7.9,2231.97 2437.1,2231.97

## Keep-outs
Keep-Out Layer:
  lines w6: 0.35,2229.6 2438.93,2229.6 2439.65,2228.88 2439.65,1.41 2438.95,0.71 0.71,0.71 -0.71,-0.71 -0.71,602.64 196.17,602.64 197.23,603.7 197.23,1602.92 191.94,1608.21 0.35,1608.21 0.35,2229.6 ; 0.35,2229.6 0.35,2229.6

## Other copper
Top Layer:
  rectangle net GND: 1992.91,1319.29 2014.17,1548.03
  rectangle net GND: 1984.95,1399.84 2004.72,1527.95
  rectangle net GND: 1812.99,1391.34 1991.73,1434.25
  rectangle net GND: 1662.2,1396.06 1699.21,1424.8
  rectangle net GND: 1915.75,1011.02 1949.61,1074.02
  rectangle net GND: 1875.98,1065.75 1952.76,1147.64
  rectangle net GND: 1904.24,1106.3 1992.52,1211.02
  rectangle net GND: 1886.61,1199.61 1920.87,1231.5
  rectangle net GND: 1990.94,1224.41 2042.13,1322.44
  rectangle net GND: 2173.23,892.91 2220,1405.51
  rectangle net GND: 1986.22,892.91 2220,926.77
  rectangle net GND: 1461.02,1028.35 1484.95,1199.61
  rectangle net GND: 1623.62,1003.15 1806.69,1029.92
  rectangle net GND: 1784.65,1007.09 1812.2,1145.28
  rectangle net GND: 1662.99,1372.05 1699.21,1396.06
  rectangle net GND: 1630.71,1369.68 1671.65,1435.04
  rectangle net 1.8V: 1550,1442.91 1651.57,1504.33
  rectangle net GND: 1812.6,1369.29 1998.03,1397.24
  rectangle net 2.9V: 2010.63,1034.65 2078.74,1049.21
  rectangle net 2.9V: 2088.98,995.67 2131.1,1346.46
  rectangle net 2.9V: 2007.48,1097.24 2070.47,1203.54
  rectangle net 1.2V: 1632.68,1313.23 1746.76,1359.45
  rectangle net 1.2V: 1630.32,1336.22 1882.28,1355.12
  rectangle net 1.2V: 1769.68,1340.94 1799.61,1484.65
  rectangle net 1.2V: 1812.99,1336.61 1939.76,1353.15
  rectangle net 1.2V: 1664.08,1286.22 1746.76,1313.23
  rectangle net 1.2V: 1712.2,1057.09 1755.51,1186.22
  rectangle net 1.2V: 1742.91,1046.06 1771.26,1165.75
  rectangle net 1.2V: 1851.97,1032.28 1892.91,1053.15
  rectangle net 1.2V: 1827.95,1015.75 1853.54,1167.72
  rectangle net 1.2V: 1907.09,1253.54 1927.17,1280.71
  rectangle net 1.2V: 1869.68,1279.92 1916.93,1305.91
  rectangle net 1.2V: 1839.37,1157.48 1894.88,1184.65
  rectangle net 1.2V: 1743.31,1159.45 1872.05,1209.45
  rectangle net GND: 2173.23,950.39 2213.39,1405.51
  rectangle net 2.9V: 2056.69,996.85 2096.46,1348.82
  rectangle net 2.9V: 2020.87,1348.82 2098.43,1404.72
  region net 2.9V: 2074.41,1046.06 2074.41,1093.31 2070.47,1097.24 2023.23,1097.24 2023.23,1091.29 2036.2,1078.32 2036.2,1059.03 2025.78,1048.61 2027.17,1047.22 2027.17,1046.06
  region net 1.2V: 1892.43,1175.43 1876.68,1159.68
Bottom Layer:
  rectangle net GND: 1886.61,1200 1918.11,1231.5
  rectangle net GND: 1918.11,1042.52 1949.61,1074.02
  rectangle net GND: 1918.11,1011.02 1981.1,1042.52
  rectangle net GND: 1655.91,1043.7 1697.24,1201.18
  rectangle net GND: 1974.41,1227.95 2041.73,1333.86
  rectangle net GND: 1635.83,1224.8 1673.23,1242.91
  rectangle net GND: 1974.02,1198.82 1992.13,1266.54
  rectangle net GND: 1624.02,980.71 1675.2,1012.2
  rectangle net GND: 1623.62,1003.15 1731.89,1053.94
  rectangle net GND: 1875.98,1066.54 1949.21,1147.64
  rectangle net GND: 1908.27,1106.69 1992.52,1211.02

## Silkscreen, mask and mechanical layers (free items; w line width, h text height)
Top Overlay:
  lines w6: 1750,1000 1860,1000 ; 1792.13,1365 1792.13,1332.87 1810,1315 1829.18,1315 ; 1820,1170 1840,1170 1860,1150 1860,1132.28 ; 1825,1500.5 1825,1525 1835,1535 1849.12,1535 ; 1880,1535 1910,1535 1917.5,1527.5 1917.5,1504.69 ; 1952.44,1322.44 1990.94,1322.44 2010,1341.5 2010,1360 ; 2010,1350 2010,1408.98 2011.02,1410 2150,1410 2175,1435 2175,1575 ; 2120,1730 2120,1600 2145,1575 2326.38,1575 ; 2210,450 2315,450 ; 2285,645 2310,645 2335,620 2335,586.97
  text "1" at 1760.63,1165 h15
  text "1" at 2225,645 h15
Bottom Overlay:
  lines w10: 1387.63,1946.37 1423.06,1946.37 ; 1387.63,2179.57 1423.06,2179.57 ; 1423.06,1930.62 1423.06,1958.18 ; 1423.06,2167.76 1423.06,2195.32 ; 1516.95,1930.62 1516.95,1958.18 ; 1516.95,1946.37 1552.38,1946.37 ; 1516.95,2167.76 1516.95,2195.32 ; 1516.95,2179.57 1552.38,2179.57
  text "SCL" at 1056.32,2171.69 h30
  text "CLK_EN" at 1367.34,2167.76 h30
  text "OMODE" at 1705.92,2163.82 h30
  text "XCE" at 1370.2,1960.52 h30 r180
  text "XCLR" at 1680.38,1932.4 h30
  text "SDA" at 1055.05,1929.09 h30
  text "11/15 KL" at 76,1837.05 h25 r90
  text "3/15 OH" at 123.25,1837.05 h25 r90
  text "IMX291LQR-C-BBB" at 388.26,1609.14 h60 r90
  text "Adapter (v1)" at 284.25,1602.76 h60 r90
  text "INCK" at 1284.25,920.08 h15
  text "PIXCLK" at 2352.36,778.35 h15
  text "D3" at 1446.08,274.06 h30
  text "D3" at 1548.44,274.06 h30
  text "D8" at 2044.51,274.06 h30
  text "D6" at 2142.93,274.06 h30
  text "D4" at 2245.29,274.06 h30
  text "D2" at 2343.72,274.06 h30
  text "1" at 37.28,207.13 h25
  text "45" at 2418.52,203.19 h25
  text "2" at 36.63,108.7 h25 r358.87
  text "46" at 2422.46,100.83 h25 r358.86
  text "D10" at 1453.95,26.03 h30
  text "D11" at 1552.38,26.03 h30
  text "D9" at 2048.44,26.03 h30
  text "D7" at 2146.87,26.03 h30
  text "D5" at 2245.29,26.03 h30
  text "D3" at 2347.65,26.03 h30

## Text inside footprints (layer, text, board x,y; h text height)
P2: Bottom Overlay "2" at 36.63,1998.47 h25; Bottom Overlay "1" at 28.76,2116.58 h25; Bottom Overlay "31" at 1717.73,2104.77 h25; Bottom Overlay "32" at 1725.61,2006.34 h25